# Altium PCB BB_LM1117_VREG.PcbDoc
Units mm, origin at the board's own origin, x right, y up, seen from the top; angles counter-clockwise.
Board outline 33 x 15 mm, 2 copper layers (Top Layer, Bottom Layer); 9 components, 4 nets, 40 pads, 7 vias.
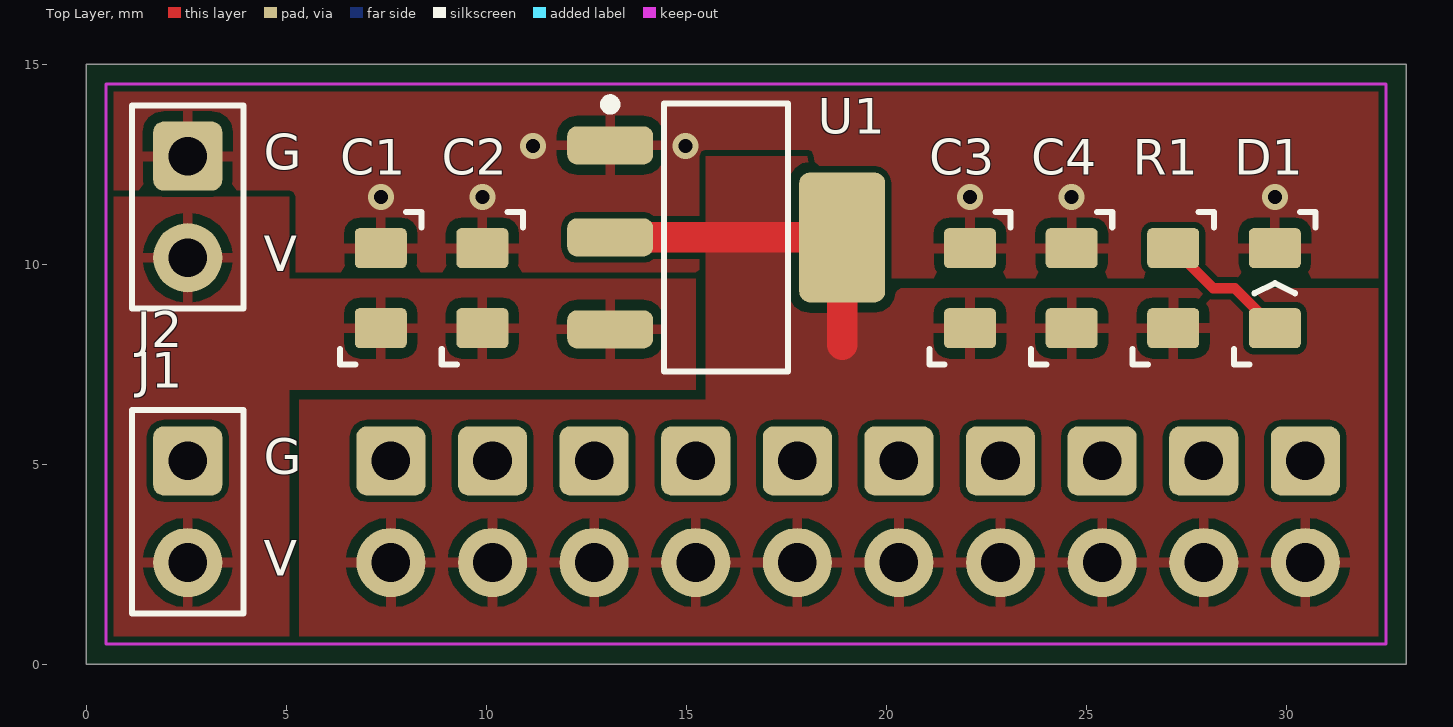
[diagram p0: Top Layer view]
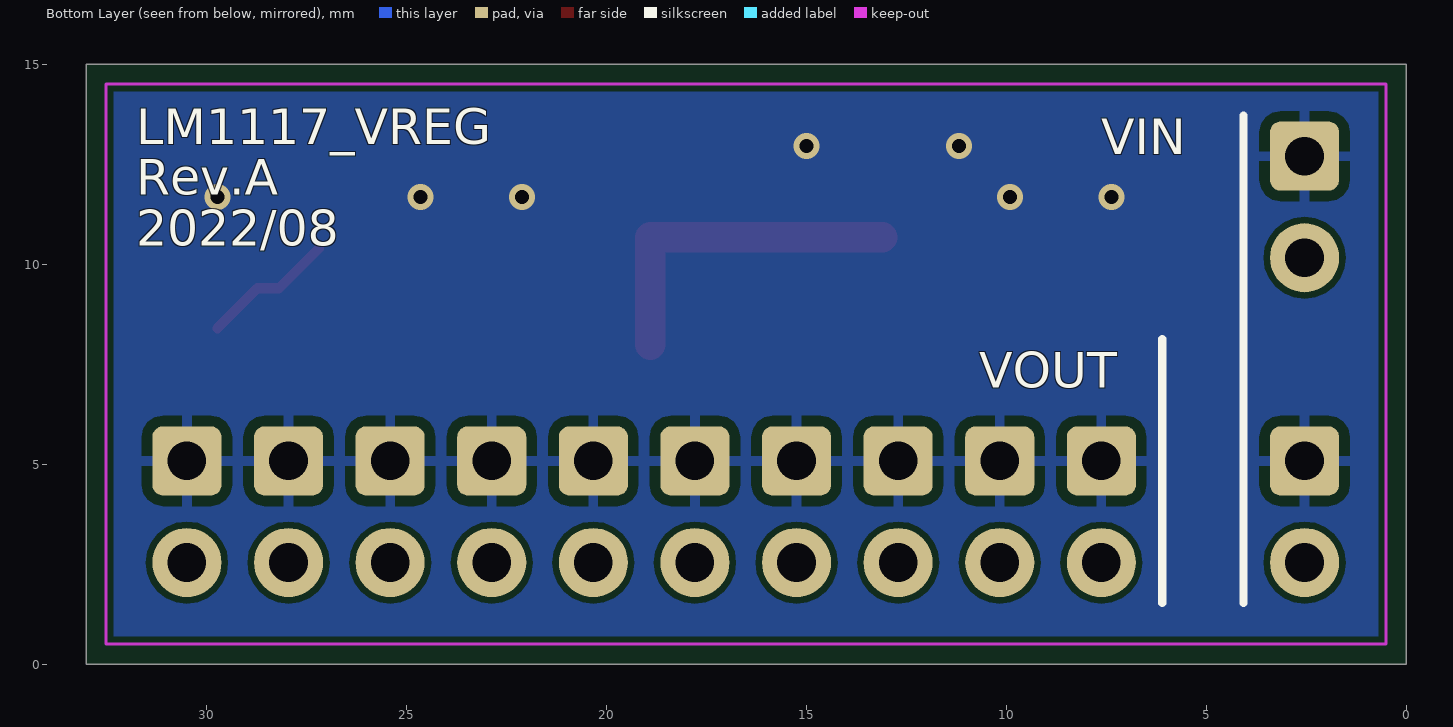
[diagram p1: Bottom Layer view, seen from below]
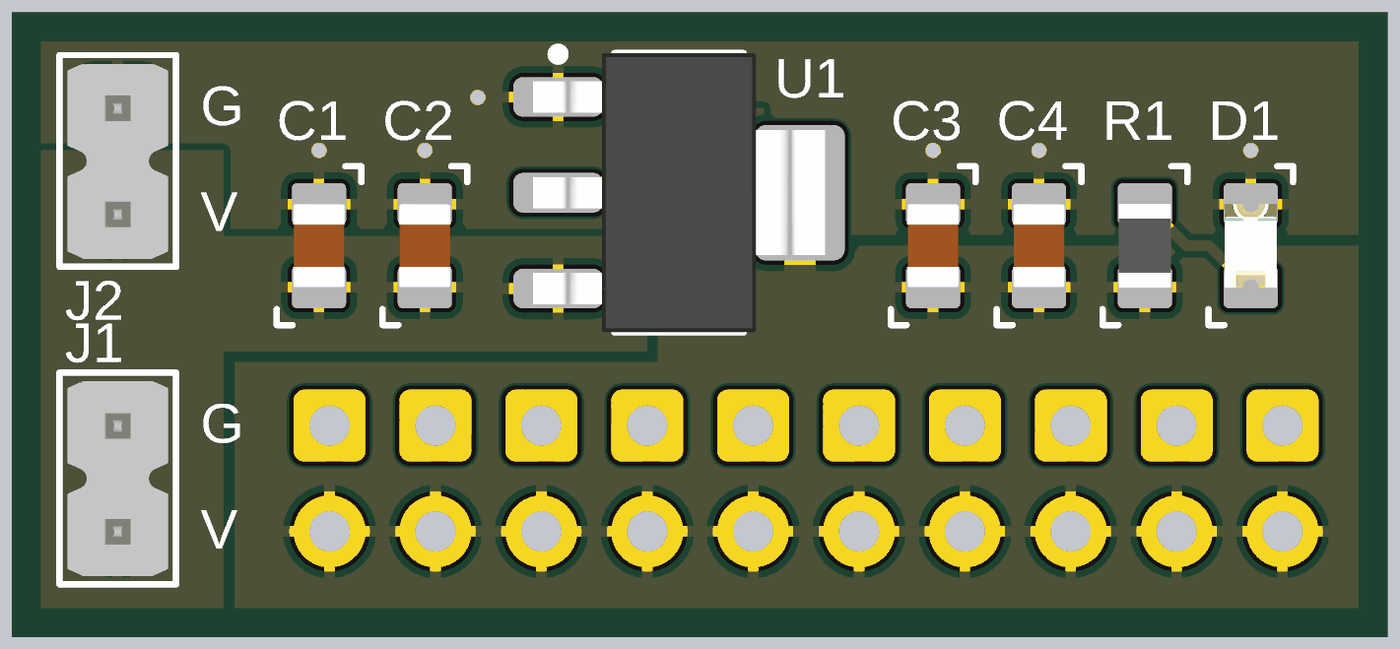
[diagram p2: 3D render of the assembled board from above, using the file's embedded part models]

## Layer stack, top to bottom
Top Solder: solder mask 0.0102, Solder Resist, Dk 3.5
Top Layer: signal copper 0.0356
Dielectric 1: dielectric 0.32, FR-4, Dk 4.8
Bottom Layer: signal copper 0.0356
Bottom Solder: solder mask 0.0102, Solder Resist, Dk 3.5

## Board outline
0,0 0,15 33,15 33,0

## Design rules (kind name [scope] priority, off if disabled: settings)
Clearance [All] p1: gap=0.152 ignorepadtopadclearanceinfootprint=FALSE
PolygonConnect [All] p1: thpad.connectstyle=Relief thpad.reliefconductorwidth=0.254 thpad.reliefentries=4 thpad.polygonreliefangle="90 Angle" thpad.airgapwidth=0.254 smdpad.connectstyle=Relief smdpad.reliefconductorwidth=0.254 smdpad.reliefentries=4 smdpad.polygonreliefangle="90 Angle" smdpad.airgapwidth=0.254 via.connectstyle=Direct via.reliefconductorwidth=0.254 via.reliefentries=4 via.polygonreliefangle="90 Angle" via.airgapwidth=0.254
RoutingVias [All] p1: holewidth=0.711 width=1.27 viastyle="Through Hole" minholewidth=0.711 minwidth=1.27 maxholewidth=0.711 maxwidth=1.27
SolderMaskExpansion [All] p1: expansion=0.102
UnRoutedNet [All] p1: checkbadconnections=TRUE
Width [All] p1: maxlimit=1.27 minlimit=0.152 preferedwidth=0.254
29 further rules are at their usual default settings.

## Components (designator, comment, footprint, x,y, rotation, side; value= is the part's Value field where it differs from the comment)
C1 "10u" 0805C_RF_M 7.366,9.398 r270 top
C2 "100n" 0805C_RF_M 9.906,9.398 r270 top
C3 "100n" 0805C_RF_M 22.098,9.398 r270 top
C4 "4u7" 0805C_RF_M 24.638,9.398 r270 top
D1 "Unspecified" 0805LED_RF_M 29.718,9.398 r270 top
J1 "PINHDR-2P1" HEADER-2.54-2P1 2.54,3.81 r270 top
J2 "PINHDR-2P1" HEADER-2.54-2P1 2.54,11.43 r270 top
R1 "1K" 0805R_RF_M 27.178,9.398 r90 top
U1 "LM1117IMP-3.3" SOT-223 16.002,10.668 r0 top

## Footprints (in the part's own frame and the unit in brackets; to place one, negate y for a bottom-side part, rotate by r counter-clockwise, add the part's x,y. Pads: shape width x height; smd on the part's side, far side on the other; paste and mask are expansions set on the pad)
0805C_RF_M [mm] "Chip Capacitor 0805 Reflow Medium"
  rrect25% 1x1.3 smd: 1(-1,0) 2(1,0)
  silkscreen extent -1.91,-1.02 1.91,1.02, body extent -1,-0.62 1.01,0.63, height 0.94
0805LED_RF_M [mm] "Chip LED 0805 Reflow Medium"
  rrect25% 1x1.3 smd: A(1,0) C(-1,0)
  silkscreen extent -1.91,-1.02 1.91,1.02, body extent -1,-0.62 1,0.63, height 0.7
0805R_RF_M [mm] "Chip Resistor 0805 Reflow Medium"
  rrect25% 1x1.3 smd: 1(-1,0) 2(1,0)
  silkscreen extent -1.91,-1.02 1.91,1.02, body extent -1,-0.62 1,0.63, height 0.6
HEADER-2.54-2P1 [mil] "Pin Header Single Row 2 Positions Pitch 2.54 mm"
  rrect30% 68x68 hole 38: 1(-50,0)
  round 68 hole 38: 2(50,0)
  silkscreen extent -100,-55 100,55, body extent -92,-47 92,47, height 330
SOT-223 [mm] "SOT-223: 4 Leads; Tab Not Connected"
  rrect50% 2.15x0.95 smd: 1(-2.9,2.3) 2(-2.9,0) 3(-2.9,-2.3)
  rrect25% 2.15x3.25 smd: 4(2.9,0)
  silkscreen extent -3.03,-3.35 1.55,3.45, body extent -3.5,-3.35 3.5,3.35, height 1.8

## Part data
C1 C2 C3 C4: library part C, "Capacitor", Manufacturer="Generic Brand", Max Voltage="? V", Tolerance=?, Category=Capacitor, Mounting Technology=SMT, Supplier Link=http://
D1: library part LED, "LED", Forward Voltage Drop="? V", Manufacturer="Generic Brand", Category=Diode, Emitting Color=Unspecified, Mounting Technology=SMT, Supplier Link=http://
J1 J2: "Pin Header Single Row 2 Positions", Mounting Technology=THT
R1: library part R, "Resistor", Manufacturer="Generic Brand", Max Voltage="? V", Power Rating="? W", Tolerance=?, Category=Resistor, Mounting Technology=SMT, Supplier Link=http://
U1: library part LM1117, "Voltage Regulator Linear 1% 800mA SOT-223", Case=SOT-223, Manufacturer="Texas Instruments", Supplier Part No=5641124530, Mounting Type=SMT, Product Number=LM1117IMP-3.3, Supplier=Chipdip, Supplier Link=https://www.chipdip.by/product/lm1117imp-3.3-nopb-2, VIN_MAX=+15V, VOUT=+3.3V

## Free pads (board coordinates)
  round 1.727 hole 0.965: 3(7.62,2.54) 4(10.16,2.54) 5(12.7,2.54) 6(15.24,2.54) 7(17.78,2.54) 8(20.32,2.54) 9(22.86,2.54) 10(25.4,2.54) 11(27.94,2.54) 12(30.48,2.54)
  rrect30% 1.727x1.727 hole 0.965: 13(7.62,5.08) 14(10.16,5.08) 15(12.7,5.08) 16(15.24,5.08) 17(17.78,5.08) 18(20.32,5.08) 19(22.86,5.08) 20(25.4,5.08) 21(27.94,5.08) 22(30.48,5.08)

## Via types
v1: diameter 0.65, hole 0.35, Top Layer to Bottom Layer, tented both sides, 7 vias

## Nets (pads, with @x,y where several pads share a name; then routed paths per layer and width w, separated by ;. In a path a pad name is that pad's centre, name@x,y a point inside that pad or via, vN(x,y) a via of type N, cw(c..) or ccw(c..) an arc to the next point about the centre after c; other vN are vias at no path point)
GND: C1.1 C2.1 C3.1 C4.1 D1.C J1.1 J2.1 pad.13 pad.14 pad.15 pad.16 pad.17 pad.18 pad.19 pad.20 pad.21 pad.22 U1.1
  other v1: 7.366,11.684 9.906,11.684 22.098,11.684 24.638,11.684 29.718,11.684 11.176,12.954 14.986,12.954
NetD1_A: D1.A R1.2 | length 3.4
  Top Layer w0.254: R1.2 28.178,9.398 28.718,9.398 D1.A
VIN: C1.2 C2.2 J1.2 J2.2 U1.3
VOUT: C3.2 C4.2 pad.3 pad.4 pad.5 pad.6 pad.7 pad.8 pad.9 pad.10 pad.11 pad.12 R1.1 U1.2 U1.4 | length 8.5
  Top Layer w0.762: U1.2 U1.4 18.902,7.98

## Polygon pours and split planes (outlines as drawn)
GND on Top Layer "NONET_L-01_P-001" (solid, remove dead copper, pour order 6): 0.5,14.5 32.5,14.5 32.5,9.652 0.5,9.652
VOUT on Top Layer "NONET_L-01_P-001" (solid, remove dead copper, pour order 2): 5.334,6.604 15.494,6.604 15.494,12.7 20.32,12.7 20.32,9.398 32.5,9.398 32.5,0.5 5.334,0.5
VIN on Top Layer "NONET_L-01_P-001" (solid, remove dead copper, pour order 4): 0.504,9.398 0.5,11.684 5.08,11.684 5.08,9.637 15.24,9.637 15.24,6.858 5.08,6.858 5.08,0.5 0.51,0.5
GND on Bottom Layer "NONET_L-01_P-001" (solid, remove dead copper, pour order 0): 0.5,0.5 32.5,0.5 32.5,14.5 0.5,14.5

## Keep-outs
Keep-Out Layer:
  lines w0.076: 0.5,0.5 0.5,14.5 32.5,14.5 32.5,0.5 0.5,0.5

## Silkscreen, mask and mechanical layers (free items; w line width, h text height)
Top Overlay:
  text "G" at 4.445,12.065 h1.52
  text "V" at 4.445,9.525 h1.52
  text "G" at 4.445,4.445 h1.52
  text "V" at 4.445,1.905 h1.52
Bottom Overlay:
  lines w0.203: 4.064,1.524 4.064,13.716 ; 6.096,1.524 6.096,8.128
  text "LM1117_VREG" at 31.75,12.7 h1.52
  text "VIN" at 7.62,12.446 h1.52
  text "Rev.A" at 31.75,11.43 h1.52
  text "2022/08" at 31.75,10.16 h1.52
  text "VOUT" at 10.668,6.604 h1.52
Mechanical 1:
  the board outline again, w0.127